# Altium PCB Board baru V.3.PcbDoc
Units mil, origin at the board's own origin, x right, y up, seen from the top; angles counter-clockwise.
Board outline 6000 x 4000 mil, 2 copper layers (Top Layer, Bottom Layer); 39 components, 71 nets, 259 pads, 57 vias.
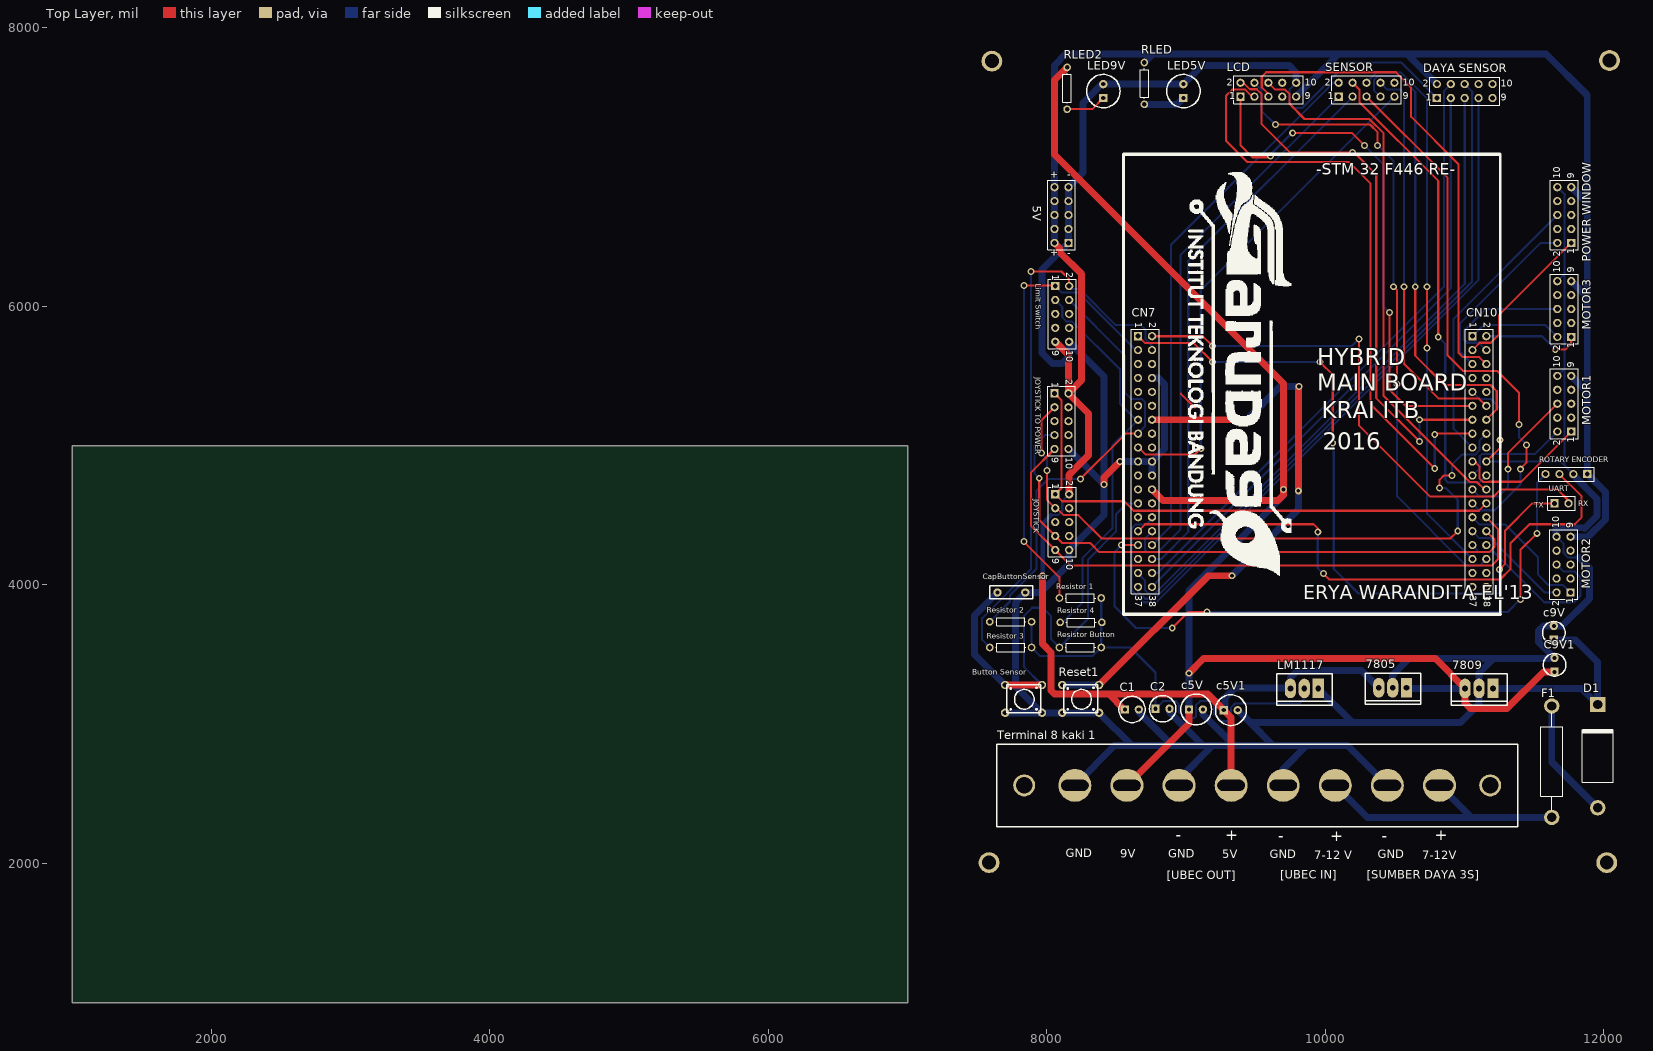
[diagram p0: Top Layer view]
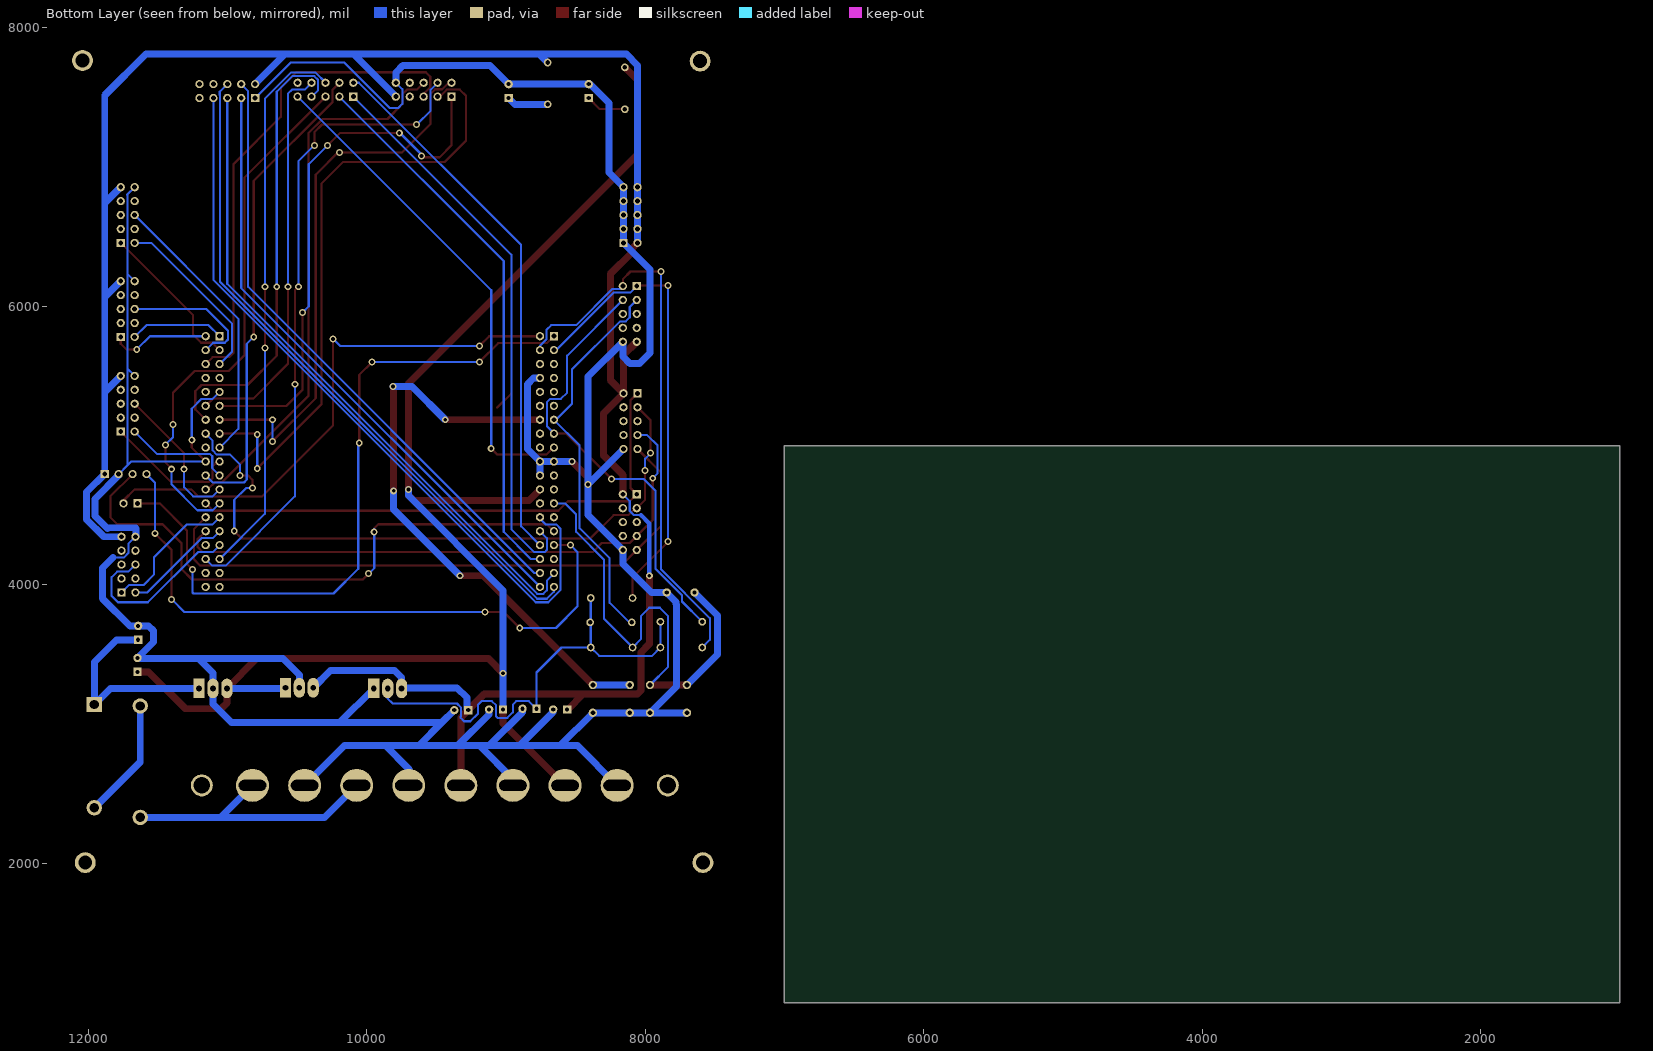
[diagram p1: Bottom Layer view, seen from below]

## Layer stack, top to bottom
Top Solder: solder mask 0.4, Solder Resist, Dk 3.5
Top Layer: signal copper 1.4
Dielectric 1: dielectric 12.6, FR-4, Dk 4.8
Bottom Layer: signal copper 1.4
Bottom Solder: solder mask 0.4, Solder Resist, Dk 3.5

## Board outline
1000,1000 7000,1000 7000,5000 1000,5000

## Design rules (kind name [scope] priority, off if disabled: settings)
Clearance [All] p1: gap=10
PolygonConnect [All] p1: connectstyle=Relief reliefconductorwidth=10 reliefentries=4 polygonreliefangle="90 Angle" airgapwidth=10
RoomDefinition "Board baru V.3" [InComponentClass('Board baru V.3')] p1: confinementstyle=ConfineIn formatcopy=TRUE lockcomponents=FALSE outline 7420,1845 12180,1845 12180,7935 7420,7935
RoutingVias [All] p1: holewidth=28 width=50 viastyle="Through Hole" minholewidth=28 minwidth=50 maxholewidth=28 maxwidth=50
SolderMaskExpansion [All] p1: expansion=4
Width [All] p1: maxlimit=70 minlimit=8 preferedwidth=15
30 further rules are at their usual default settings.

## Classes and differential pairs
component class "Board baru V.3": 5V 7805 "Button Sensor" C1 C2 c5V c5V1 c9V C9V1 CapButtonSensor CN7 CN10 D1 "DAYA SENSOR" F1 JOYSTICK LCD LED5V LED9V "Limit Switch" Motor1 Motor2 MOTOR3 "POWER WINDOW" Reset1 "Resistor 1" RLED RLED2 "ROTARY ENCODER" SENSOR "Terminal 8 kaki 1"

## Components (designator, comment, footprint, x,y, rotation, side; value= is the part's Value field where it differs from the comment)
5V "Header 5X2" HDR2X5 8155,6455 r90 top
7805 "78XX/79XX" "78XX/79XX diri" 10885,2965 r270 top
7809 "Comment" "78XX/79XX diri" 11505,2960 r270 top
"Button Sensor" "pushbutton" pushbutton 7400,3180 r180 top
C1 "cap 10uF/16V" "cap 10uF/16V" 8660,3105 r0 top
C2 "cap 10uF/16V" "cap 10uF/16V" 8880,3110 r0 top
c5V "cap 220uF/16V" "cap 220uF/16V" 9020,3105 r0 top
c5V1 "cap 47uF/35V" "cap 220uF/16V" 9270,3100 r0 top
c9V "cap 220uF/50V" "cap 1uF/50V" 11640,3305 r90 top
C9V1 "cap 47uF/35V" "cap 1uF/50V" 11645,3075 r90 top
CapButtonSensor "cap MKM 100nF" "cap MKM 100nF diri" 7745,3945 r0 top (schematic designator "C Button Sensor")
CN7 "Header 19X2" HDR2X19 8655,5785 r270 top
CN10 "Header 19X2" HDR2X19 11055,5785 r270 top
D1 "Diode 1N5400" DO-201AD 11955,2770 r90 top
"DAYA SENSOR" "Header 5X2" HDR2X5 10800,7495 r0 top
F1 "Inductor Adj" AXIAL-0.8 11625,2730 r90 top
JOYSTICK "Header 5X2" HDR2X5 8060,4650 r270 top
"JOYSTICK TO POWER" "Comment" HDR2X5 8055,5375 r270 top
LCD "Header 5X2" HDR2X5 9390,7505 r0 top
LED5V "LED sedang" "LED sedang" 8980,7695 r90 top
LED9V "LED sedang" "LED sedang" 8405,7695 r90 top
"Limit Switch" "Header 5X2" HDR2X5 8060,6145 r270 top
LM1117 "Comment" "78XX/79XX diri" 10250,2960 r270 top
MOTOR1 "Header 5X2" HDR2X5 11765,5100 r90 top (schematic designator Motor1)
MOTOR2 "Header 5X2" HDR2X5 11760,3945 r90 top (schematic designator Motor2)
MOTOR3 "Header 5X2" HDR2X5 11765,5780 r90 top
"POWER WINDOW" "Header 5X2" HDR2X5 11765,6455 r90 top
Reset1 "pushbutton" pushbutton 7810,3180 r180 top
"Resistor 1" "Res1" AXIAL-0.3 8240,3905 r0 top (schematic designator "Resistor Reset")
"Resistor 2" "Res1" AXIAL-0.3 7740,3735 r0 top (schematic designator "Resistor Reset")
"Resistor 3" "Res1" AXIAL-0.3 7740,3550 r0 top (schematic designator "Resistor Reset")
"Resistor 4" "Res1" AXIAL-0.3 8245,3730 r0 top (schematic designator "Resistor Reset")
"Resistor Button" "Res1" AXIAL-0.3 8240,3550 r0 top (schematic designator "Resistor Reset")
RLED "Res1" AXIAL-0.3 8700,7600 r90 top
RLED2 "Res1" AXIAL-0.3 8145,7565 r90 top
"ROTARY ENCODER" "Header 4" HDR1X4 11880,4795 r180 top
SENSOR "Header 5X2" HDR2X5 10095,7505 r0 top
"Terminal 8 kaki 1" "Terminal Blok 8 Kaki Besar" "TERMINAL 8 KAKI" 11380,2855 r180 top
UART "Comment" HDR1X2 11645,4585 r0 top

## Footprints (in the part's own frame and the unit in brackets; to place one, negate y for a bottom-side part, rotate by r counter-clockwise, add the part's x,y. Pads: shape width x height; smd on the part's side, far side on the other; paste and mask are expansions set on the pad)
"78XX/79XX diri" [mil]
  rect 140x80 hole 42: 1(-296,-302)
  oval 140x80 hole 42: 2(-296,-402) 3(-296,-502)
  silkscreen extent -400,-600 -176,-200
AXIAL-0.3 [mm] "Axial Device, Thru-Hole; 2 Leads; 0.3 in Pin Spacing"
  round 1.4 hole 0.85: 1(-3.81,0) 2(3.81,0)
  silkscreen extent -2.77,-0.76 2.77,0.76
AXIAL-0.8 [mm] "Axial Device, Thru-Hole; 2 Leads; 0.8 in Pin Spacing"
  round 2.8 hole 1.7: 1(-10.16,0) 2(10.16,0)
  silkscreen extent -8.89,-2.03 8.89,2.03
"cap 1uF/50V" [mil]
  rect 60x60 hole 30: 1(300,0)
  round 60 hole 30: 2(400,0)
  silkscreen extent 269,-81 432,81
"cap 10uF/16V" [mil]
  rect 60x60 hole 30: 1(-100,0)
  round 60 hole 30: 2(0,0)
  silkscreen extent -144,-95 46,95
"cap 220uF/16V" [mil]
  rect 60x60 hole 30: 1(0,0)
  round 60 hole 30: 2(100,0)
  silkscreen extent -59,-111 162,111
"cap MKM 100nF diri" [mil]
  round 60 hole 30: 1(-100,0) 2(100,0)
  silkscreen extent -154,-46 154,48
DO-201AD [mm] "Diode, Axial; Body 9.5 x 5.6 mm (LxDia. max), Lead Dia. 1.32 mm (max)"
  round 2.8 hole 1.7: 1(-9.42,0)
  rect 2.8x2.8 hole 1.7: 2(9.42,0)
  silkscreen extent -4.8,-2.8 4.9,2.8
HDR1X2 [mm] "Connector; Header; 2 Position"
  rect 1.5x1.5 hole 0.9: 1(0,0)
  round 1.5 hole 0.9: 2(2.54,0)
  silkscreen extent -1.27,-1.27 3.81,1.27
HDR1X4 [mm] "Connector; Header; 4 Position"
  rect 1.5x1.5 hole 0.9: 1(0,0)
  round 1.5 hole 0.9: 2(2.54,0) 3(5.08,0) 4(7.62,0)
  silkscreen extent -1.27,-1.27 8.89,1.27
HDR2X5 [mm] "Connector; Header; 5x2 Position"
  rect 1.5x1.5 hole 0.9: 1(0,0)
  round 1.5 hole 0.9: 2(0,2.54) 3(2.54,0) 4(2.54,2.54) 5(5.08,0) 6(5.08,2.54) 7(7.62,0) 8(7.62,2.54) 9(10.16,0) 10(10.16,2.54)
  silkscreen extent -1.27,-1.27 11.43,3.81
HDR2X19 [mm] "Connector; Header; 19x2 Position"
  rect 1.5x1.5 hole 0.9: 1(0,0)
  round 1.5 hole 0.9: 2(0,2.54) 3(2.54,0) 4(2.54,2.54) 5(5.08,0) 6(5.08,2.54) 7(7.62,0) 8(7.62,2.54) 9(10.16,0) 10(10.16,2.54) 11(12.7,0) 12(12.7,2.54) 13(15.24,0) 14(15.24,2.54) 15(17.78,0) 16(17.78,2.54) 17(20.32,0) 18(20.32,2.54) 19(22.86,0) 20(22.86,2.54) 21(25.4,0) 22(25.4,2.54) 23(27.94,0) 24(27.94,2.54) 25(30.48,0) 26(30.48,2.54) 27(33.02,0) 28(33.02,2.54) 29(35.56,0) 30(35.56,2.54) 31(38.1,0) 32(38.1,2.54) 33(40.64,0) 34(40.64,2.54) 35(43.18,0) 36(43.18,2.54) 37(45.72,0) 38(45.72,2.54)
  silkscreen extent -1.27,-1.27 46.99,3.81
"LED sedang" [mil]
  rect 60x60 hole 30: 1(-200,0)
  round 60 hole 30: 2(-100,0)
  silkscreen extent -270,-120 -30,120
pushbutton [mil]
  round 60 hole 35: 1(-565,-101) 1(-300,-101) 2(-565,99) 2(-300,99)
  silkscreen extent -555,-101 -310,99
"TERMINAL 8 KAKI" [mm] "Terminal Blok Hitam 8 Kaki"
  round 6 hole 2 slot 5 at 0 deg: 1(14.25,7.5) 2(23.75,7.5) 3(33.25,7.5) 4(42.75,7.5) 5(52.25,7.5) 6(61.75,7.5) 7(71.25,7.5) 8(80.75,7.5)
  round 4 hole 3: " "(5,7.5) " "(90,7.5)
  silkscreen extent 0,0 95,15

## Part data
5V "DAYA SENSOR" JOYSTICK LCD "Limit Switch" MOTOR1 MOTOR2 MOTOR3 "POWER WINDOW" SENSOR: "Header, 5-Pin, Dual row"
7805: library part 7805/7809/7812/7905/7909/7912
c5V1: library part "cap 220uF/16V"
c9V C9V1: library part "cap 1uF/50V"
CN7 CN10: "Header, 19-Pin, Dual row"
D1: "3 Amp General Purpose Rectifier"
F1: "Adjustable Inductor"
"Resistor 1" "Resistor 2" "Resistor 3" "Resistor 4" "Resistor Button" RLED RLED2: "Resistor"
"ROTARY ENCODER": "Header, 4-Pin"
"Terminal 8 kaki 1": library part "Terminal Block 8 kaki"

## Free pads (board coordinates)
  round 150 hole 100: 2(7585,2005) 2(7605,7760) 2(12020,2005) 2(12040,7765)

## Via types
v1: diameter 50, hole 28, Top Layer to Bottom Layer, 57 vias

## Nets (pads, with @x,y where several pads share a name; then routed paths per layer and width w, separated by ;. In a path a pad name is that pad's centre, name@x,y a point inside that pad or via, vN(x,y) a via of type N, cw(c..) or ccw(c..) an arc to the next point about the centre after c; other vN are vias at no path point)
3.3V: CN7.5
3V3: CN7.16
5V: CN7.18
AGND: CN10.32
AVDD: CN10.7
BOOT0: CN7.7
E5V: CN7.6
FUSE2: "Terminal 8 kaki 1.1" "Terminal 8 kaki 1.3" F1.1 | length 1974.1
  Bottom Layer w50: 10070.94,2559.72 10300.67,2330 11048.7,2330 ; 10818.98,2559.72 11048.7,2330 ; F1.1 11048.7,2330
GND: 5V.1 5V.3 5V.5 5V.7 5V.9 7805.2 7809.2 "Button Sensor.2" "DAYA SENSOR.1" "JOYSTICK TO POWER.10" "Limit Switch.10" "POWER WINDOW.10" "ROTARY ENCODER.2" "Terminal 8 kaki 1.2" "Terminal 8 kaki 1.4" "Terminal 8 kaki 1.6" "Terminal 8 kaki 1.8" C1.2 C2.2 c5V1.2 c5V.2 C9V1.2 c9V.2 CapButtonSensor.2 CN7.8 CN7.19 CN7.20 CN7.22 CN10.9 CN10.20 JOYSTICK.10 LCD.10 LED5V.2 LED9V.2 LM1117.1 MOTOR1.10 MOTOR2.10 MOTOR3.10 Reset1.2 | length 25394.3
  Top Layer w15: CN10.20 11255,4985 v1(11255,5040)
  Top Layer w50: v1(8410,4720) 8410,4770 v1(8525,4885)
  Bottom Layer w15: LCD.10 9742.97,7557.97 9742.97,7452.97 9770.94,7425 9835,7425 10160,7750 10545,7750 10800,7495 ; CN10.9 11105,5335 11185,5335 11255,5265 v1(11255,5040) 11245,5040 v1@11240,5035 ; CN10.20 11690,4885 11717.97,4857.03 ; MOTOR2.10 11710,4295 11710,4228.49 11743.49,4195 11820,4195 ; MOTOR1.10 11717.97,5552.97 ; MOTOR3.10 11717.97,6232.97 ; 11665,6855 11720,6800 11717.97,6797.97 11717.97,6232.97 ; 11780,4795 11717.97,4857.03 ; 11717.97,4857.03 11717.97,5552.97 ; 11717.97,5552.97 11717.97,6232.97
  Bottom Layer w50: 7700,3081 7965,3081 ; 8155,4975 v1(8410,4720) ; 8200.87,2559.72 8486.14,2845 8610,2845 ; 8295,4835 v1(8410,4720) ; v1(8525,4885) CN7.19 CN7.20 ; C1.2 8660,3085 8900,2845 ; CN7.22 CN7.20 ; CN7.8 8800,5485 8845,5440 8845,4975 CN7.20 ; C2.2 8880,3085 9120,2845 ; 8948.9,2559.72 8948.9,2603.9 9190,2845 ; c5V.2 9120,3070 9345,2845 ; c5V1.2 9460,3010 ; 9696.93,2559.72 9696.93,2676.93 9865,2845 ; LCD.10 9790,7680 9740,7730 9115,7730 LED5V.2 LED9V.2 8395.5,7595 8260,7459.5 8260,6960 5V.9 5V.7 5V.5 5V.3 5V.1 7965,6265 7965,5665 8040,5590 8110,5590 8160,5640 8160,5745 8410,5495 v1(8410,4720) ; LM1117.1 10194,3010 ; 10444.96,2559.72 10159.69,2845 9865,2845 ; 7805.2 10483,3353 10600,3470 11206,3470 ; MOTOR2.10 11655,4350 11655,4405 11659.53,4409.53 11855.62,4409.53 11860.15,4405 11950,4494.85 11950,4616.45 11780,4786.45 11780,4795 ; 11820,4195 11895,4120 11895,3900 11700,3705 c9V.2 11565,3705 11530,3670 11530,3590 C9V1.2 11640,3470 11206,3470 ; 7965,3081 7775,3271 7775,3859.9 7777.5,3862.4 7777.5,3877.5 CapButtonSensor.2 7955,3945 8160,4150 JOYSTICK.10 8410,4500 v1(8410,4720) ; 7965,3081 8110,3081 8375,3081 8610,2846 8610,2845 ; 8610,2845 8900,2845 ; 8900,2845 9120,2845 ; 9120,2845 9190,2845 ; 9190,2845 9345,2845 ; 9345,2845 9625,2845 ; 9460,3010 10194,3010 ; 9460,3010 9625,2845 ; 9625,2845 9865,2845 ; 10194,3010 10970,3010 11103,3143 7809.2 11103,3367 11206,3470
IOREF: CN7.12
Net7809_1: 7809.1 c9V.1 D1.2 | length 1485.1
  Bottom Layer w50: 7809.1 11839.87,3256 D1.2 11955,3445 11795,3605 c9V.1
NetLED5V_1: LED5V.1 RLED.1 | length 298.6
  Bottom Layer w50: RLED.1 8935,7450 LED5V.1
NetLED9V_1: LED9V.1 RLED2.1 | length 293.1
  Top Layer w15: RLED2.1 8325,7415 LED9V.1
"NetLimit Switch_2": 
PA_0: "DAYA SENSOR.7" CN7.28 | length 5421.1
  Bottom Layer w15: CN7.28 8755,4475 8712.03,4432.03 8635.52,4432.03 8607.97,4404.48 8607.97,3961.67 8694.64,3875 8785.36,3875 11100,6189.64 11100,7495
PA_1: CN7.30 SENSOR.1 | length 4060.4
  Bottom Layer w15: CN7.30 8705,4335 8705,4250 8720,4235 8795,4235 8960,4400 8960,6370 SENSOR.1
PA_2: CN10.35
PA_3: CN10.37
PA_4: CN7.32 SENSOR.2 | length 3898.5
  Bottom Layer w15: CN7.32 8890,4420 8890,6440 10055,7605 SENSOR.2
PA_5: CN10.11 LCD.1 | length 3871.8
  Top Layer w15: LCD.1 9390,7155 9475,7070 v1@9610,7070 ; v1(9765,7245) 10190,7245 v1(10280,7155) ; v1@10460,5970 v1(10460,5955) 10460,5400 10575,5285 CN10.11
  Bottom Layer w15: v1(9605,7080) v1@9605,7090 ; v1(10280,7155) 10415,7020 10415,6000 v1(10460,5955)
  Bottom Layer w20: v1@9605,7090 v1@9755,7240 ; v1(9765,7245) v1@9770,7245
PA_6: CN10.13 LCD.2 | length 3988.9
  Top Layer w15: LCD.2 9410.36,7605 9457.38,7557.97 9507.03,7557.97 9540,7525 9540,7310 9745,7105 v1(10195,7105) ; v1@10195,7115 10365,6945 10365,5340 v1(10675,5030) ; v1@10655,5190 10660,5185 v1(10675,5185) CN10.13
  Bottom Layer w15: v1@10675,5020 v1(10675,5030) v1(10675,5185)
PA_7: CN10.15 LCD.3 | length 4502.4
  Top Layer w15: LCD.3 9475,7505 9425,7555 9330,7555 9285,7510 9285,7190 9440,7035 10170,7035 10325,6880 10325,5295 v1(10785,4835) ; v1@10780,5075 v1(10785,5080) 10790,5085 CN10.15
  Bottom Layer w15: v1@10785,4825 v1(10785,4835) v1(10785,5080)
PA_8: CN10.23 MOTOR1.6 | length 1069.7
  Top Layer w15: v1@11310,4810 v1(11310,4830) 11310,4945 MOTOR1.6
  Bottom Layer w15: CN10.23 11105,4635 11245,4635 11310,4700 v1(11310,4830)
PA_9: CN10.21 MOTOR1.2 | length 790.3
  Bottom Layer w15: CN10.21 11107.97,4837.97 11107.97,4922.97 11122.97,4937.97 11502.97,4937.97 MOTOR1.2
PA_10: CN10.33 SENSOR.6 | length 4008.2
  Top Layer w15: v1@10730,5685 v1(10730,5700) v1(10730,6140)
  Bottom Layer w15: SENSOR.6 10295,7606.86 10365.17,7677.03 10543.33,7677.03 10730,7490.36 v1(10730,6140) v1@10730,6130 ; v1(10730,5700) 10730,4510 CN10.33
PA_11: CN10.14 SENSOR.7 | length 3315.5
  Top Layer w15: v1(10645,6140) 10645,5645 10855,5435 11185,5435 11230,5390 11230,5260 CN10.14
  Bottom Layer w15: SENSOR.7 10347.97,7552.03 10347.97,7624.48 10375.52,7652.03 10532.97,7652.03 10645,7540 v1(10645,6140)
PA_12: CN10.12 SENSOR.8 | length 2857.4
  Top Layer w15: v1(10565,6140) 10565,5585 10812.97,5337.03 11102.97,5337.03 CN10.12
  Bottom Layer w15: SENSOR.8 10445,7555 10535,7555 10565,7525 v1(10565,6140)
PA_13: "Limit Switch.3" "Resistor 4.1" CN7.13 | length 2838.2
  Bottom Layer w15: 8060,6045 8110,5995 8110,5920 8137.97,5892.03 8179.48,5892.03 8525,5546.51 8525,5300 8640,5185 CN7.13 8470,5000 8470,4405 8255,4190 8255,3870 8115,3730 8095,3730
PA_14: "Limit Switch.4" "Resistor 2.1" CN7.15 | length 3234
  Top Layer w15: v1(8240,4760) 8565,5085 CN7.15
  Bottom Layer w15: 7590,3735 7735,3880 7735,3924.64 7925,4114.64 7925,4675 8010,4760 v1(8240,4760) v1@8245,4760 ; 8160,6045 8560,5645 8560,5380 8605,5335 8680,5335 8705,5310 8705,5140 8655,5090 CN7.15
PA_15: CN7.17 SENSOR.9 | length 3590.1
  Top Layer w15: CN7.17 8660,4985 8710,4935 9060,4935 v1(9105,4980)
  Bottom Layer w15: v1(9105,4980) 9105,6115 SENSOR.9
PB_0: CN7.34 SENSOR.3 | length 3954.5
  Bottom Layer w15: CN7.34 8820,4185 9015,4380 9015,6325 SENSOR.3
PB_1: CN10.24 LCD.6 | length 3920.8
  Top Layer w15: LCD.6 9640,7555 9710,7555 9742.97,7522.03 9742.97,7452.03 9850,7345 10315.36,7345 10417.5,7242.86 10417.5,5355.99 11035.52,4737.97 11087.03,4737.97 11140,4685 CN10.24
PB_2: CN10.22 SENSOR.4 | length 3459.4
  Top Layer w15: SENSOR.4 10245,7555 10245,7465 10810,6900 v1(10810,5780)
  Bottom Layer w15: v1@10810,5790 v1(10810,5780) 10860,5730 10860,4755 10880,4735 11105,4735 CN10.22
PB_3: CN10.31 MOTOR2.6 | length 1305.7
  Bottom Layer w15: CN10.31 11105,4235 11210,4235 11570,3875 11785,3875 11830,3920 11830,4055 11790,4095 11710,4095 MOTOR2.6
PB_4: CN10.27 MOTOR2.1 | length 1001.9
  Bottom Layer w15: CN10.27 11107.97,4432.03 11292.97,4432.03 11525,4200 11525,4075 11602.03,3997.97 11707.03,3997.97 MOTOR2.1
PB_5: CN10.29 MOTOR2.2 | length 787.3
  Bottom Layer w15: CN10.29 11105,4335 11185,4335 11575,3945 MOTOR2.2
PB_6: "POWER WINDOW.6" CN10.17 | length 2034.5
  Bottom Layer w15: CN10.17 10920,5120 10920,5910 11665,6655
PB_7: CN7.21
PB_8: "POWER WINDOW.1" CN10.3 | length 1111
  Top Layer w15: CN10.3 11107.97,5737.97 11187.97,5737.97 11245,5795 11245,5935 11765,6455
PB_9: "POWER WINDOW.2" CN10.5 | length 1267.5
  Bottom Layer w15: CN10.5 10965,5675 10965,5875 11545,6455 11665,6455
PB_10: CN10.25 SENSOR.5 | length 3892.1
  Top Layer w15: SENSOR.5 10875,6925 10875,5650 10990,5535 11235,5535 11390,5380 v1(11390,5150) v1@11390,5140 ; v1@11390,4825 11445,4880 v1(11445,5005)
  Bottom Layer w15: CN10.25 11105,4535 11215,4535 11400,4720 v1(11400,4830) ; v1(11390,5150) 11390,5060 v1(11445,5005) v1@11450,5000
PB_12: "JOYSTICK TO POWER.3" CN10.16 JOYSTICK.3 | length 4849
  Top Layer w15: v1(7960,4945) 7960,5180 8055,5275 ; v1@8000,4830 v1(8000,4820) 8000,4610 JOYSTICK.3 8070,4550 8120,4500 8225,4500 8392.97,4332.03 10897.03,4332.03 v1(10950,4385) v1@10955,4390 ; v1(10820,4695) 10820,4755 10850,4785 v1(10910,4785)
  Bottom Layer w15: v1@7950,4955 v1(7960,4945) 8000,4905 v1(8000,4820) ; v1(10820,4695) 10865,4695 10950,4610 v1(10950,4385) ; v1(10910,4785) 10910,4865 10980,4935 11075,4935 11105,4965 11105,5035 CN10.16
PB_13: "JOYSTICK TO POWER.7" CN10.30 JOYSTICK.7 | length 4242.3
  Top Layer w15: v1(7945,4765) 7945,4465 JOYSTICK.7 8110,4300 8310,4300 8375,4235 11175,4235 11215,4275 11215,4325 CN10.30
  Bottom Layer w15: v1(7945,4765) 7910,4800 7910,5000 7985,5075 8055,5075
PB_14: "JOYSTICK TO POWER.9" CN10.28 JOYSTICK.9 | length 4449
  Top Layer w15: 8055,4975 7885,4805 7885,4425 JOYSTICK.9 8172.03,4137.97 11192.97,4137.97 11240,4185 11240,4400 CN10.28
PB_15: "JOYSTICK TO POWER.1" CN10.26 JOYSTICK.1 | length 3930.2
  Top Layer w15: 8055,5375 8105,5325 8105,4695 JOYSTICK.1 8110,4600 8555,4600 8622.97,4532.03 11102.03,4532.03 CN10.26
PC_0: "DAYA SENSOR.3" CN7.38 | length 4398.5
  Bottom Layer w15: CN7.38 10900,6130 10900,7495
PC_1: "DAYA SENSOR.4" CN7.36 | length 4421.9
  Bottom Layer w15: CN7.36 8795,4085 10850,6140 10850,7545 10900,7595
PC_2: "DAYA SENSOR.5" CN7.35 | length 4707.5
  Bottom Layer w15: CN7.35 8655,4080 8705,4030 8705,3960 8730,3935 8774.64,3935 11000,6160.36 11000,7495
PC_3: "DAYA SENSOR.6" CN7.37 | length 4837.3
  Bottom Layer w15: CN7.37 8655,3950 8705,3900 8775,3900 11052.97,6177.97 11052.97,7514.48 11054.25,7515.75 11054.25,7540.75 11000,7595
PC_4: CN10.34 LCD.4 | length 4658.3
  Top Layer w15: v1(9640,7305) 10320,7305 10375,7250 v1(10375,7155) ; v1(10490,6140) 10515,6115 v1(10515,5440)
  Bottom Layer w15: LCD.4 9540,7555 9540,7405 v1(9640,7305) ; v1(10375,7155) 10490,7040 v1(10490,6140) ; v1(10515,5440) 10515,4635 11012.03,4137.97 11107.97,4137.97 CN10.34
PC_5: CN10.6 LCD.5 | length 3572.3
  Top Layer w15: LCD.5 9590,7525 9542.97,7572.03 9542.97,7647.97 9575,7680 10505,7680 10615,7570 10615,7360 10955,7020 10955,5665 10985,5635 11105,5635 CN10.6
PC_6: CN10.4 MOTOR3.6 | length 989.6
  Bottom Layer w15: CN10.4 11102.03,5737.97 11018.22,5737.97 10995,5761.2 10995,5825 11150,5980 MOTOR3.6
PC_7: CN10.19 MOTOR1.1 | length 970.6
  Top Layer w15: CN10.19 11070,4885 11105,4850 11105,4765 11132.03,4737.97 11174.48,4737.97 11176.51,4740 11405,4740 MOTOR1.1
PC_8: CN10.2 MOTOR3.1 | length 730.1
  Top Layer w15: v1(11650,5690) 11725,5690 11765,5730 MOTOR3.1
  Bottom Layer w15: CN10.2 11555,5785 v1(11650,5690) v1@11660,5680
PC_9: CN10.1 MOTOR3.2 | length 678.3
  Bottom Layer w15: CN10.1 11135,5865 11580,5865 MOTOR3.2
PC_10: CN7.1 UART.1 | length 5113.4
  Top Layer w15: CN7.1 8705,5735 9055,5735 v1(9190,5600) ; v1@9955,5605 v1(9960,5600) 10052.5,5507.5 v1(10052.5,5017.5) ; v1@11240,4100 v1(11250,4110) 11290,4150 11290,4390 11485,4585 UART.1
  Bottom Layer w15: v1@9180,5600 v1(9190,5600) v1(9960,5600) ; v1@10045,5025 v1(10052.5,5017.5) 10060,5010 10060,4115 10237.03,3937.97 11242.97,3937.97 11250,3945 v1(11250,4110)
PC_11: CN7.2 UART.2 | length 3969.8
  Top Layer w15: CN7.2 9120,5785 v1(9190,5715) ; v1@10240,5780 v1(10240,5765) 10240,5145 10750,4635 11210,4635 11260,4685 11665,4685 11745,4605 UART.2
  Bottom Layer w15: v1@9190,5705 v1(9190,5715) 10190,5715 v1(10240,5765)
PC_12: "Limit Switch.1" "Resistor 1.1" CN7.3 | length 3395.9
  Top Layer w15: v1@7822.5,4322.5 v1(7835,4310) 8090,4055 8090,3905 ; v1(7835,6150) 8055,6150 8060,6145
  Bottom Layer w15: v1(7835,4310) v1(7835,6150) v1@7835,6165 ; 8060,6145 8107.03,6097.97 8227.03,6097.97 8640,5685 CN7.3
PC_13: CN7.23
PC_14: "Button Sensor.1" "Resistor Button.1" CapButtonSensor.1 CN7.25 | length 3446.8
  Top Layer w50: 7700,3281 7965,3281
  Bottom Layer w15: 7965,3281 7835,3411 7835,3775 7895,3835 7970,3835 8030,3775 8030,3610 8090,3550 8295,3755 8295,4180 8495,4380 8495,4505 8575,4585 CN7.25
  Bottom Layer w50: CapButtonSensor.1 7480,3780 7480,3501 7700,3281
PC_15: CN7.27
PD_2: "Limit Switch.2" "Resistor 3.1" CN7.4 | length 4059.7
  Top Layer w15: v1(7885,6250) 8105,6250 8160,6195 8160,6145
  Bottom Layer w15: 7590,3550 7535,3605 7535,3760 7885,4110 v1(7885,6250) ; 8160,6145 8182.03,6122.97 8237.38,6122.97 8495.36,5865 8675,5865 8707.97,5832.03 8707.97,5763.49 8755,5716.47 CN7.4
PH_0: "ROTARY ENCODER.3" CN7.29 | length 4241.1
  Top Layer w15: CN7.29 8705,4435 9915,4435 9945,4405 v1(9945,4380) ; v1(9985,4080) 10027.03,4037.97 11252.97,4037.97 11330,4115 11330,4300 11465,4435 11790,4435 11840,4485 11840,4635 11680,4795
  Bottom Layer w15: v1@9945,4400 9945,4120 v1(9985,4080) v1@9995,4070
PH_1: "ROTARY ENCODER.4" CN7.31 | length 4658.5
  Top Layer w15: v1@8520,4285 v1(8535,4285) CN7.31 ; v1(8900,3690) 9015,3805 v1(9150,3805) ; v1(11400,3895) 11400,4250 v1(11520,4370) v1@11525,4375
  Bottom Layer w15: v1(8535,4285) 8485,4235 8485,3845 8640,3690 v1(8900,3690) v1@8910,3690 ; v1(9150,3805) 11310,3805 v1(11400,3895) v1@11405,3900 ; v1(11520,4370) 11520,4735 11580,4795
RESET: CN7.14 Reset1.1 | length 4258
  Top Layer w50: Reset1.1@8375,3281 9159,4065 v1(9330,4065) ; CN7.14 v1(9435,5185) ; v1(9805,4675) 9805,5420 v1(9810,5425)
  Bottom Layer w50: Reset1.1@8110,3281 Reset1.1@8375,3281 ; v1(9330,4065) 9805,4540 v1(9805,4675) ; v1(9435,5185) 9675,5425 v1(9810,5425)
U5V: CN10.8
V3.3: "Resistor 1.2" "Resistor 2.2" "Resistor 3.2" "Resistor 4.2" "Resistor Button.2" C2.1 LM1117.2 | length 3369.5
  Bottom Layer w15: 7890,3735 7890,3550 7950,3490 8330,3490 8390,3550 ; 8390,3905 8390,3550 ; LM1117.2 9848,3183 9812.5,3147.5 9350.32,3147.5 9322.5,3119.68 9322.5,3056.41 9325,3053.91 9325,3045 9300,3020 9255,3020 9200,3075 9200,3140 9175,3165 9100,3165 9070,3135 9070,3055 9060,3045 8990,3045 8950,3085 8950,3140 8925,3165 8835,3165 C2.1 8780,3370 8600,3550 8390,3550
VBAT: CN7.33
VCC: 5V.2 5V.4 5V.6 5V.8 5V.10 7805.3 "DAYA SENSOR.2" "JOYSTICK TO POWER.2" "Limit Switch.9" "POWER WINDOW.9" "ROTARY ENCODER.1" "Terminal 8 kaki 1.5" C1.1 c5V1.1 JOYSTICK.2 LCD.9 LM1117.3 MOTOR1.9 MOTOR2.9 MOTOR3.9 RLED.2 | length 17367.9
  Top Layer w15: v1(7970,4065) v1@7970,4075 ; C1.1@8555,3105 C1.1
  Top Layer w50: v1(7970,4065) 7970,3575 8030,3515 8030,3240 8055,3215 8445,3215 ; 5V.2 8090.47,6419.53 8090.47,6390.47 8250,6230.94 8250,5470 8155,5375 ; 8060,5745 8155,5650 8155,5375 ; JOYSTICK.2 8160,4790 8300,4930 8300,5230 8155,5375 ; C1.1@8555,3105 8445,3215 ; 9322.91,2559.72 9322.91,3047.09 c5V1.1 9155,3215 8445,3215
  Bottom Layer w15: 8030,4500 8080,4500 8110,4530 8110,4600 JOYSTICK.2
  Bottom Layer w30: v1(7970,4065) 7970,4440 8030,4500
  Bottom Layer w50: 5V.2 5V.4 5V.6 5V.8 5V.10 8055,7730 8135,7810 8760,7810 ; RLED.2 8760,7810 ; c5V1.1 9280,3110 9280,3190 9350,3260 9744,3260 LM1117.3 9748,3333 9800,3385 10259,3385 7805.3 ; LCD.9 10095,7810 ; 10800,7595 10585,7810 ; MOTOR2.9 11885,4345 12010,4470 12010,4665 11880,4795 11880,5385 ; MOTOR1.9 11880,5385 ; MOTOR3.9 11880,6065 ; 11765,6855 11880,6740 ; 8760,7810 10095,7810 ; 10095,7810 10585,7810 ; 10585,7810 11585,7810 11880,7515 11880,6740 ; 11880,5385 11880,6065 ; 11880,6065 11880,6740
VIN: 7805.1 7809.3 "Terminal 8 kaki 1.7" c5V.1 C9V1.1 CN7.24 RLED2.2 | length 10785
  Top Layer w50: RLED2.2 8055,7625 8055,7090 9700,5445 v1(9700,4685) 9700,4645 9660,4605 8835,4605 CN7.24 ; 8574.88,2559.72 9020,3004.84 c5V.1 ; v1(9020,3365) 9125,3470 10789,3470 7809.3 11003,3152 11045,3110 11300,3110 11565,3375 C9V1.1
  Bottom Layer w50: c5V.1 9020,3960 9700,4640 v1(9700,4685) ; 7805.1 10588,3256 7809.3
VIN12: D1.1 F1.2 | length 867.6
  Bottom Layer w50: F1.2 11625,2729.13 D1.1
pads on no net: "DAYA SENSOR.8" "DAYA SENSOR.9" "DAYA SENSOR.10" "JOYSTICK TO POWER.4" "JOYSTICK TO POWER.5" "JOYSTICK TO POWER.6" "JOYSTICK TO POWER.8" "Limit Switch.5" "Limit Switch.6" "Limit Switch.7" "Limit Switch.8" "POWER WINDOW.3" "POWER WINDOW.4" "POWER WINDOW.5" "POWER WINDOW.7" "POWER WINDOW.8" "Terminal 8 kaki 1. " CN7.9 CN7.10 CN7.11 CN7.26 CN10.10 CN10.18 CN10.36 CN10.38 JOYSTICK.4 JOYSTICK.5 JOYSTICK.6 JOYSTICK.8 LCD.7 LCD.8 MOTOR1.3 MOTOR1.4 MOTOR1.5 MOTOR1.7 MOTOR1.8 MOTOR2.3 MOTOR2.4 MOTOR2.5 MOTOR2.7 MOTOR2.8 MOTOR3.3 MOTOR3.4 MOTOR3.5 MOTOR3.7 MOTOR3.8 SENSOR.10
copper on no net: | length 141.4
  Top Layer w15: 8962.03,5372.97 9062.03,5272.97

## Silkscreen, mask and mechanical layers (free items; w line width, h text height)
Top Overlay:
  drawing of 1820 lines, arcs and shapes, not listed
  text "-STM 32 F446 RE-" at 9935,6945 h80
  text "HYBRID / MAIN BOARD" at 9940,5395 h120
  text "KRAI ITB" at 9975,5195 h120
  text "2016" at 9980,4970 h120
  text "RX" at 11815,4565 h40
  text "TX" at 11500,4555 h40
  text "ERYA WARANDITA EL'13" at 9840,3895 h100
  text "-" at 8925,2165 h80
  text "+" at 9280,2165 h80
  text "+" at 10785,2165 h80
  text "-" at 9660,2160 h80
  text "+" at 10035,2160 h80
  text "-" at 10405,2160 h80
  text "GND" at 8135,2045 h60
  text "9V" at 8525,2040 h60
  text "GND" at 8870,2040 h60
  text "5V" at 9260,2035 h60
  text "GND" at 9600,2035 h60
  text "GND" at 10375,2035 h60
  text "7-12 V" at 9920,2030 h60
  text "7-12V" at 10695,2030 h60
  text "[UBEC IN]" at 9675,1890 h60
  text "[SUMBER DAYA 3S]" at 10295,1890 h60
  text "[UBEC OUT]" at 8860,1885 h60

## Dimensions
12195.04,8020 to 7435.04,8020 on Top Layer

## Text inside footprints (layer, text, board x,y; h text height)
5V: Top Overlay "+" at 8075,6915 h50 r90; Top Overlay "-" at 8170,6960 h50 r180; Top Overlay "-" at 8170,6395 h50 r180; Top Overlay "+" at 8075,6355 h50 r90
CN7: Top Overlay "2" at 8735,5885 h50 r270; Top Overlay "1" at 8635,5885 h50 r270; Top Overlay "37" at 8635,3925 h50 r270; Top Overlay "38" at 8735,3925 h50 r270
CN10: Top Overlay "2" at 11135,5885 h50 r270; Top Overlay "1" at 11035,5885 h50 r270; Top Overlay "37" at 11035,3925 h50 r270; Top Overlay "38" at 11135,3925 h50 r270
"DAYA SENSOR": Top Overlay "10" at 11260,7575 h50; Top Overlay "9" at 11260,7475 h50; Top Overlay "1" at 10720,7475 h50; Top Overlay "2" at 10700,7575 h50
JOYSTICK: Top Overlay "10" at 8140,4190 h50 r270; Top Overlay "9" at 8040,4190 h50 r270; Top Overlay "1" at 8040,4730 h50 r270; Top Overlay "2" at 8140,4750 h50 r270
"JOYSTICK TO POWER": Top Overlay "10" at 8135,4915 h50 r270; Top Overlay "9" at 8035,4915 h50 r270; Top Overlay "1" at 8035,5455 h50 r270; Top Overlay "2" at 8135,5475 h50 r270
LCD: Top Overlay "10" at 9850,7585 h50; Top Overlay "9" at 9850,7485 h50; Top Overlay "1" at 9310,7485 h50; Top Overlay "2" at 9290,7585 h50
"Limit Switch": Top Overlay "10" at 8140,5685 h50 r270; Top Overlay "9" at 8040,5685 h50 r270; Top Overlay "1" at 8040,6225 h50 r270; Top Overlay "2" at 8140,6245 h50 r270
MOTOR1: Top Overlay "10" at 11685,5560 h50 r90; Top Overlay "9" at 11785,5560 h50 r90; Top Overlay "1" at 11785,5020 h50 r90; Top Overlay "2" at 11685,5000 h50 r90
MOTOR2: Top Overlay "10" at 11680,4405 h50 r90; Top Overlay "9" at 11780,4405 h50 r90; Top Overlay "1" at 11780,3865 h50 r90; Top Overlay "2" at 11680,3845 h50 r90
MOTOR3: Top Overlay "10" at 11685,6240 h50 r90; Top Overlay "9" at 11785,6240 h50 r90; Top Overlay "1" at 11785,5700 h50 r90; Top Overlay "2" at 11685,5680 h50 r90
"POWER WINDOW": Top Overlay "10" at 11685,6915 h50 r90; Top Overlay "9" at 11785,6915 h50 r90; Top Overlay "1" at 11785,6375 h50 r90; Top Overlay "2" at 11685,6355 h50 r90
SENSOR: Top Overlay "10" at 10555,7585 h50; Top Overlay "9" at 10555,7485 h50; Top Overlay "1" at 10015,7485 h50; Top Overlay "2" at 9995,7585 h50